# EAGLE board untitled2 (EAGLE 7.5.0)

Size 100 x 55.5 mm. Coordinates in mm from the lower left corner, seen from the top.
Outline: 0,0 100,0 100,55.5 0,55.5 0,0
Copper layers (1*16): Top 0.035mm / dielectric 1.5mm / Bottom 0.035mm
Design rules "default": minimum track width 10mil, minimum drill 24mil, track to track 8mil, track to pad 8mil, pad to pad 8mil, via to via 8mil, smd to smd 8mil, copper to edge 40mil, drill to drill 8mil, minimum pad ring 10mil, minimum via ring 8mil, stop-mask expansion 4mil, vias tented up to drill 0mil, thermal gap 10mil

## Footprints (pad centres in the part's own frame; a part is rotated, then mirrored left to right if it is on the bottom)
C1206 = smd 1.6 x 1.8: 1 -1.4,0; 2 1.4,0
C0603 = smd 1.1 x 1: 1 -0.85,0; 2 0.85,0
SOT23 = smd 1 x 1.4: 1 -0.95,-1.1; 2 0.95,-1.1; 3 0,1.1
QFP80P900X900X120-32N = smd 1.473 x 0.508: 1 -4.242,2.794; 2 -4.242,2.007; 3 -4.242,1.194; 4 -4.242,0.406; 5 -4.242,-0.406; 6 -4.242,-1.194; 7 -4.242,-2.007; 8 -4.242,-2.794; 17 4.242,-2.794; 18 4.242,-2.007; 19 4.242,-1.194; 20 4.242,-0.406; 21 4.242,0.406; 22 4.242,1.194; 23 4.242,2.007; 24 4.242,2.794 | smd 0.508 x 1.473: 9 -2.794,-4.242; 10 -2.007,-4.242; 11 -1.194,-4.242; 12 -0.406,-4.242; 13 0.406,-4.242; 14 1.194,-4.242; 15 2.007,-4.242; 16 2.794,-4.242; 25 2.794,4.242; 26 2.007,4.242; 27 1.194,4.242; 28 0.406,4.242; 29 -0.406,4.242; 30 -1.194,4.242; 31 -2.007,4.242; 32 -2.794,4.242
6410-02 = drill 1.016 long: 1 1.27,0; 2 -1.27,0
2X13 = drill 1.016 octagon: 1 -15.24,-1.27; 2 -15.24,1.27; 3 -12.7,-1.27; 4 -12.7,1.27; 5 -10.16,-1.27; 6 -10.16,1.27; 7 -7.62,-1.27; 8 -7.62,1.27; 9 -5.08,-1.27; 10 -5.08,1.27; 11 -2.54,-1.27; 12 -2.54,1.27; 13 0,-1.27; 14 0,1.27; 15 2.54,-1.27; 16 2.54,1.27; 17 5.08,-1.27; 18 5.08,1.27; 19 7.62,-1.27; 20 7.62,1.27; 21 10.16,-1.27; 22 10.16,1.27; 23 12.7,-1.27; 24 12.7,1.27; 25 15.24,-1.27; 26 15.24,1.27
2X03 = drill 1.016 octagon: 1 -2.54,-1.27; 2 -2.54,1.27; 3 0,-1.27; 4 0,1.27; 5 2.54,-1.27; 6 2.54,1.27
1X06 = drill 1.016 long: 1 -6.35,0; 2 -3.81,0; 3 -1.27,0; 4 1.27,0; 5 3.81,0; 6 6.35,0
1X03 = drill 1.016 long: 1 -2.54,0; 2 0,0; 3 2.54,0
1X04 = drill 1.016 long: 1 -3.81,0; 2 -1.27,0; 3 1.27,0; 4 3.81,0
1X01 = drill 1.016 octagon: 1 0,0
LED3MM = drill 0.813 octagon: A -1.27,0; K 1.27,0
HC49UP = smd 5.334 x 1.93: 1 -4.826,0; 2 4.826,0
BSS138 = smd 1 x 1.4: D 0,1.1; G -0.95,-1.1; S 0.95,-1.1
R1206 = smd 1.6 x 1.803: 1 -1.422,0; 2 1.422,0
NAMAE-JTP-1130 = drill 1.1 octagon: P$1 3.3,-2.3; P$2 -3.3,-2.3; P$3 3.3,2.3; P$4 -3.3,2.3
TO92 = drill 0.813 octagon: 1 1.27,0; 2 0,1.905; 3 -1.27,0
NAVILOK-NL-631ETTL = drill 0.7 pad 0.813 offset: P$1 0,0; P$2 1.25,0; P$3 2.5,0; P$4 3.75,0; P$5 5,0; P$6 6.25,0 | drill 0.7 pad 1.016 offset: P$7 0.9,10.55; P$8 5.3,10.55
4POL254 = drill 1.2 long: 1 -3.81,0; 2 -1.27,0; 3 1.27,0; 4 3.81,0

## Placement (x,y rotation side)
C2  22pF  [C1206]  -53.34,39.37 0 top  (outside the outline)
C3  22pF  [C1206]  -59.69,39.37 0 top  (outside the outline)
C4  100 nF  [C0603]  -46.99,59.69 0 top  (outside the outline)
D1  4.7V  [SOT23]  -59.69,30.48 0 top  (outside the outline)
D2  4.7V  [SOT23]  -15.24,39.37 0 top  (outside the outline)
IC1  ATMEGA328P-AU  [QFP80P900X900X120-32N]  -35.56,8.89 0 top  (outside the outline)
J1  22-27-2021-02  [6410-02]  38,51.5 90 top
JP1  [2X13]  48,3.5 180 top
JP2  [2X03]  -52.07,30.48 0 top  (outside the outline)
JP3  Compass  [1X06]  -25.4,39.37 0 top  (outside the outline)
JP4  [1X03]  -55.88,52.07 0 top  (outside the outline)
JP5  HMC5883L  [1X06]  -41.91,39.37 0 top  (outside the outline)
JP7  [1X04]  -34.29,52.07 0 top  (outside the outline)
JP8  [1X04]  -45.72,52.07 0 top  (outside the outline)
JP9  [1X01]  -39.37,58.42 0 top  (outside the outline)
LED1  green  [LED3MM]  -30.48,64.77 0 top  (outside the outline)
LED2  yellow  [LED3MM]  -20.32,64.77 0 top  (outside the outline)
LED3  red  [LED3MM]  -39.37,64.77 0 top  (outside the outline)
Q1  [HC49UP]  -39.37,21.59 0 top  (outside the outline)
Q2  BSS138  [BSS138]  -44.45,64.77 0 top  (outside the outline)
Q3  BSS138  [BSS138]  -48.26,64.77 0 top  (outside the outline)
R1  50k  [R1206]  -21.59,46.99 0 top  (outside the outline)
R2  10k  [R1206]  -26.67,46.99 0 top  (outside the outline)
R3  470k  [R1206]  -16.51,46.99 0 top  (outside the outline)
R5  1M  [R1206]  -31.75,46.99 0 top  (outside the outline)
R6  1M  [R1206]  -36.83,46.99 0 top  (outside the outline)
R7  1M  [R1206]  -41.91,46.99 0 top  (outside the outline)
R9  220  [R1206]  -46.99,46.99 0 top  (outside the outline)
R10  10k  [R1206]  -52.07,46.99 0 top  (outside the outline)
R11  10k  [R1206]  -57.15,46.99 0 top  (outside the outline)
R13  10k  [R1206]  -62.23,46.99 0 top  (outside the outline)
R14  220  [R1206]  -15.24,53.34 0 top  (outside the outline)
R15  220  [R1206]  -20.32,53.34 0 top  (outside the outline)
RB  0  [R1206]  -25.4,53.34 0 top  (outside the outline)
S1  [NAMAE-JTP-1130]  -55.88,3.81 0 top  (outside the outline)
S3  [NAMAE-JTP-1130]  -17.78,21.59 0 top  (outside the outline)
S4  [NAMAE-JTP-1130]  -26.67,21.59 0 top  (outside the outline)
T1  BC517  [TO92]  -58.42,58.42 0 top  (outside the outline)
U$2  NAVILOK-NL-631ETTL  [NAVILOK-NL-631ETTL]  -21.59,3.81 0 top  (outside the outline)
X2  [4POL254]  -19.05,58.42 0 top  (outside the outline)
X4  [4POL254]  -30.48,58.42 0 top  (outside the outline)

## Library data of the parts
C2-C4 R1 R2 R9-R11 R13-R15 RB = resistor
D1 D2 = diode
IC1 = Ava; DESCRIPTION: 8-bit Microcontroller with In-System Programmable Flash; MPN: ATMEGA328P-AU; OC_FARNELL: 1715486; OC_NEWARK: 14R4631; PACKAGE: TQFP-32; SUPPLIER: Atmel
J1 = con-molex; OC_FARNELL: unknown; OC_NEWARK: unknown
JP1-JP5 JP7-JP9 = pinhead
LED1-LED3 = led
Q1 = crystal; OC_FARNELL: unknown; OC_NEWARK: unknown
Q2 Q3 = Ava
R3 = eagle-ltspice; SPICEMODEL: NONE; SPICEPREFIX: R
R5-R7 = rcl
S1 S3 S4 U$2 = 0liver
T1 = transistor
X2 X4 = con-phoenix-254; OC_FARNELL: unknown; OC_NEWARK: unknown

## Nets
+5V: JP2.2
+12V: R7.2 X2.1
GND: C2.2 C3.2 C4.2 D1.1 D2.1 IC1.3 IC1.5 IC1.21 JP1.6 JP2.6 JP3.4 JP3.6 JP4.1 JP5.5 JP7.1 JP8.2 JP8.3 LED1.K LED2.K LED3.K R3.1 R6.1 S4.P$3 U$2.P$7 U$2.P$8 X2.2 X4.2
MES_V: IC1.23 IC1.24 JP4.2
MISO: IC1.14 JP2.1
MOSI: IC1.13 JP2.4
N$1: R5.2 X2.4
N$3: C3.1 IC1.8 Q1.2
N$4: C2.1 IC1.7 Q1.1
N$5: IC1.28 JP3.3 JP5.2
N$6: R3.2 T1.2 X4.4
N$7: IC1.17 R14.1
N$8: JP8.4 JP9.1
N$9: IC1.32 X2.3
N$10: IC1.12 JP7.2
N$11: IC1.1 T1.1
N$19: IC1.2 S3.P$1
N$20: LED1.A R9.2
N$21: IC1.27 JP3.2 JP5.3
N$23: JP1.1 Q3.G R2.2 RB.2
N$25: JP1.10 Q2.D R11.1
N$26: JP1.8 Q3.D R13.1
N$27: J1.1 S1.P$1
N$28: J1.2 S1.P$3
N$29: IC1.16 R9.1
N$30: LED2.A R14.2
N$32: R15.1 U$2.P$5
N$33: LED3.A R15.2
N$46: IC1.31 Q2.S R10.1
N$47: IC1.30 Q3.S R2.1
N$51: Q2.G R10.2 RB.1
PWR: IC1.11 U$2.P$4
RES: IC1.29 JP2.5 R1.1 S4.P$1
RESET: D1.3 IC1.26 R5.1 R6.2
RESET1: D2.3 IC1.25 R7.1 X4.1
RX: IC1.9 U$2.P$3
SCK: IC1.15 JP2.3
TX: IC1.10 U$2.P$2
VCC: C4.1 IC1.4 IC1.6 IC1.18 IC1.20 JP1.2 JP3.1 JP4.3 JP5.6 JP7.4 JP8.1 R1.2 R11.2 R13.2 S3.P$3 T1.3 U$2.P$1 X4.3

## Tracks (layer width: path | path; a pad name or v marks a point on that pad's centre or on a via)
+12V  (1 unrouted)
GND  (26 unrouted)
MES_V  (2 unrouted)
MISO  (1 unrouted)
MOSI  (1 unrouted)
N$1  (1 unrouted)
N$3  (2 unrouted)
N$4  (2 unrouted)
N$5  (2 unrouted)
N$6  (2 unrouted)
N$7  (1 unrouted)
N$8  (1 unrouted)
N$9  (1 unrouted)
N$10  (1 unrouted)
N$11  (1 unrouted)
N$19  (1 unrouted)
N$20  (1 unrouted)
N$21  (2 unrouted)
N$23  (3 unrouted)
N$25  (2 unrouted)
N$26  (2 unrouted)
N$27  (1 unrouted)
N$28  (1 unrouted)
N$29  (1 unrouted)
N$30  (1 unrouted)
N$32  (1 unrouted)
N$33  (1 unrouted)
N$46  (2 unrouted)
N$47  (2 unrouted)
N$51  (2 unrouted)
PWR  (1 unrouted)
RES  (3 unrouted)
RESET  (3 unrouted)
RESET1  (3 unrouted)
RX  (1 unrouted)
SCK  (1 unrouted)
TX  (1 unrouted)
VCC  (17 unrouted)